# EAGLE board buttons (EAGLE 7.7.0)
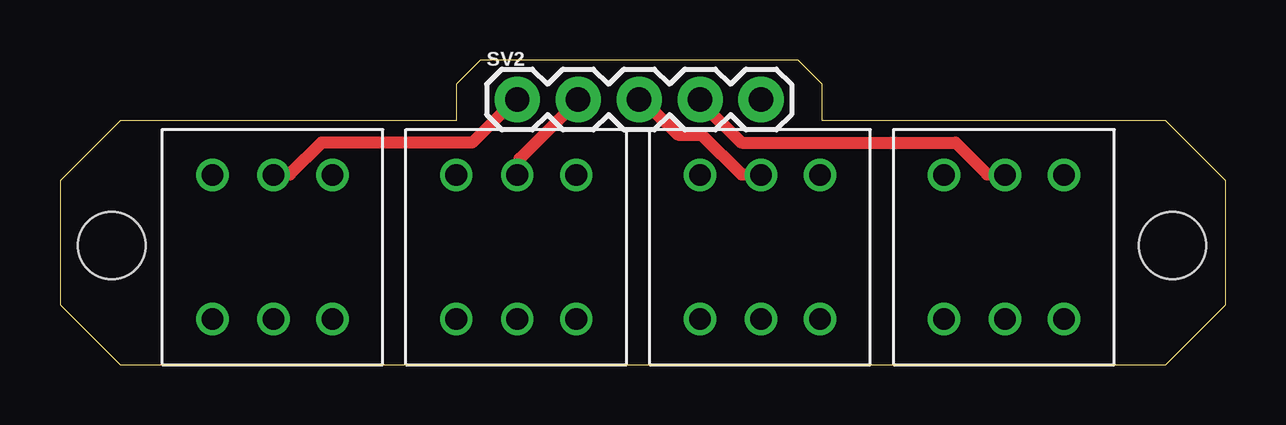
[diagram p0: board, top side]
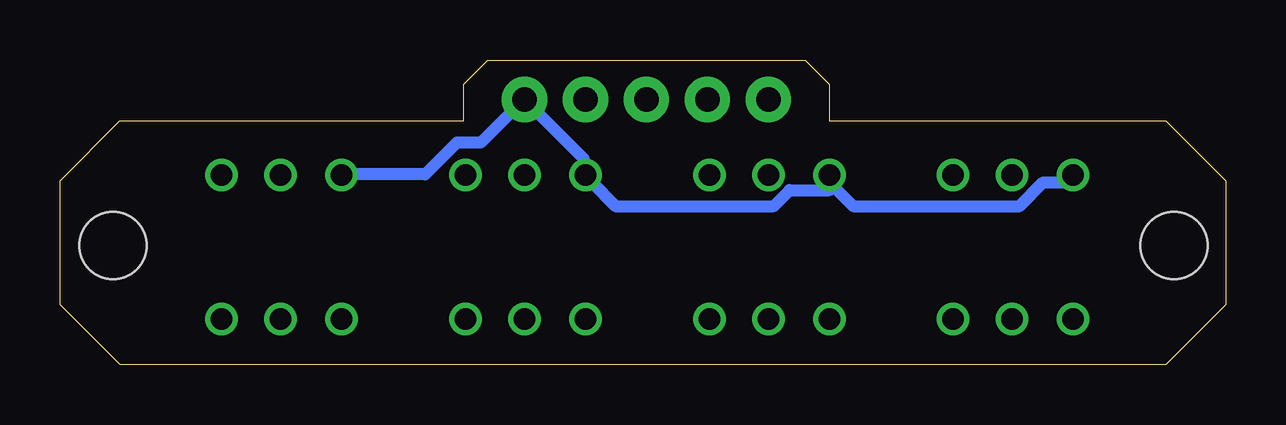
[diagram p1: board, bottom side, seen from below]

Size 48.56 x 12.69 mm. Coordinates in mm from the lower left corner, seen from the top.
Outline: 16.51,10.16 2.5,10.16 0,7.66 0,2.5 2.5,0 46.06,0 48.56,2.5 48.56,7.65 46.07,10.15 31.75,10.16 31.75,11.69 30.75,12.69 17.51,12.69 16.51,11.69 16.51,10.16
Copper layers (1*16): Top 0.035mm / dielectric 1.6mm / Bottom 0.035mm
Design rules "Elecrow_2-layer": minimum track width 6mil, minimum drill 12mil, track to track 6mil, track to pad 6mil, pad to pad 6mil, via to via 8mil, smd to smd 0mil, copper to edge 20mil, drill to drill 10mil, minimum pad ring 6mil, minimum via ring 6mil, stop-mask expansion 0mil, vias tented up to drill 100mil, thermal gap 10mil
Net classes: 0 default: width 0.508 mm
Holes 2.8 mm at 2.15,4.96 46.35,4.96

## Footprints (pad centres in the part's own frame; a part is rotated, then mirrored left to right if it is on the bottom)
1X05 = drill 1.016 pad 1.88: 1 0,0; 2 2.54,0; 3 5.08,0; 4 7.62,0; 5 10.16,0
PVA = drill 0.9: 0 2.54,6; 0' 2.54,0; 1 5,6; 1' 5,0; 2 0,6; 2' 0,0

## Placement (x,y rotation side)
SV2  [1X05]  19.05,11.04 0 top
U$2  PVA2-OA  [PVA]  36.83,1.91 0 top
U$3  PVA2-OA  [PVA]  26.67,1.91 0 top
U$4  PVA2-OA  [PVA]  16.51,1.91 0 top
U$5  PVA2-OA  [PVA]  6.35,1.91 0 top

## Library data of the parts
SV2 = SparkFun-Connectors
U$2-U$5 = Sega; HEIGHT: 17.54

## Nets
N$2: SV2.4 U$2.0
N$3: SV2.3 U$3.0
N$4: SV2.2 U$4.0
N$5: SV2.1 U$5.0
N$6: SV2.5 U$2.2 U$3.2 U$4.2 U$5.2

## Tracks (layer width: path | path; a pad name or v marks a point on that pad's centre or on a via)
N$2
  Top 0.508: U$2.0 39.29,7.92 38.63,7.92 37.31,9.25 28.4,9.25 26.75,10.9 SV2.4
N$3
  Top 0.508: U$3.0 29.06,7.92 28.4,7.92 26.75,9.58 25.76,9.58 24.43,10.9 SV2.3
N$4
  Top 0.508: U$4.0 19.15,7.92 19.15,8.59 21.46,10.9 SV2.2
N$5
  Top 0.508: U$5.0 8.91,7.92 9.58,7.92 10.9,9.25 17.17,9.25 18.82,10.9 SV2.1
N$6
  Bottom 0.508: 16.51,7.59 15.52,6.6 8.59,6.6 7.59,7.59 6.6,7.59 U$5.2 | U$2.2 36.65,7.92 33.35,7.92 32.03,9.25 31.04,9.25 29.39,10.9 SV2.5 29.06,10.9 26.75,8.59 26.75,7.92 U$3.2 26.42,7.59 25.43,6.6 18.82,6.6 18.16,7.26 16.51,7.26 16.51,7.59 | 16.51,7.59 U$4.2